# EAGLE board MCU board ATmega328p v2.2 (EAGLE 9.2.1)

Size 19.03 x 26.34 mm. Coordinates in mm from the lower left corner, seen from the top.
Outline: 0,0 19.03,0 19.03,26.34 0,26.34 0,0
Copper layers (1*16): Top 0.035mm / dielectric 1.5mm / Bottom 0.035mm
Design rules "default": minimum track width 6mil, minimum drill 0.35mm, track to track 6mil, track to pad 6mil, pad to pad 6mil, via to via 6mil, smd to smd 6mil, copper to edge 40mil, drill to drill 6mil, minimum pad ring 10mil, minimum via ring 8mil, stop-mask expansion 4mil, vias tented up to drill 0mil, thermal gap 10mil

## Footprints (pad centres in the part's own frame; a part is rotated, then mirrored left to right if it is on the bottom)
CAPPM3216X180N = smd 1.7 x 1.25: 1 -1.35,0; 2 1.35,0
CAPC3216X229N = smd 1.02 x 1.82: 1 -1.4,0; 2 1.4,0
SON75P200X200X100-6N = smd 0.95 x 0.4: 1 -0.9,0.75; 2 -0.9,0; 3 -0.9,-0.75; 4 0.9,-0.75; 5 0.9,0; 6 0.9,0.75
QFN45P400X400X100-29N = smd 0.7 x 0.25: 1 -2.05,1.35; 2 -2.05,0.9; 3 -2.05,0.45; 4 -2.05,0; 5 -2.05,-0.45; 6 -2.05,-0.9; 7 -2.05,-1.35; 15 2.05,-1.35; 16 2.05,-0.9; 17 2.05,-0.45; 18 2.05,0; 19 2.05,0.45; 20 2.05,0.9; 21 2.05,1.35 | smd 0.25 x 0.7: 8 -1.35,-2.05; 9 -0.9,-2.05; 10 -0.45,-2.05; 11 0,-2.05; 12 0.45,-2.05; 13 0.9,-2.05; 14 1.35,-2.05; 22 1.35,2.05; 23 0.9,2.05; 24 0.45,2.05; 25 0,2.05; 26 -0.45,2.05; 27 -0.9,2.05; 28 -1.35,2.05 | smd 2.45 x 2.45: 29 0,0
SOT230P700X170-4N = smd 1.75 x 0.95: 1 -3.15,2.3; 2 -3.15,0; 3 -3.15,-2.3 | smd 1.75 x 3.25: 4 3.15,0
QFN65P600X600X100-29N = smd 1.05 x 0.35: 1 -2.85,1.95; 2 -2.85,1.3; 3 -2.85,0.65; 4 -2.85,0; 5 -2.85,-0.65; 6 -2.85,-1.3; 7 -2.85,-1.95; 15 2.85,-1.95; 16 2.85,-1.3; 17 2.85,-0.65; 18 2.85,0; 19 2.85,0.65; 20 2.85,1.3; 21 2.85,1.95 | smd 0.35 x 1.05: 8 -1.95,-2.85; 9 -1.3,-2.85; 10 -0.65,-2.85; 11 0,-2.85; 12 0.65,-2.85; 13 1.3,-2.85; 14 1.95,-2.85; 22 1.95,2.85; 23 1.3,2.85; 24 0.65,2.85; 25 0,2.85; 26 -0.65,2.85; 27 -1.3,2.85; 28 -1.95,2.85 | smd 4.2 x 4.2: 29 0,0
2X3-NS = drill 1.016 pad 1.88: 1 -2.54,-1.27; 2 -2.54,1.27; 3 0,-1.27; 4 0,1.27; 5 2.54,-1.27; 6 2.54,1.27
2,15/1,0 = drill 1.016 pad 2.159 octagon: 1 0,0
RESC0603X28N = smd 0.625 x 0.4: 1 -0.412,0; 2 0.412,0
SMD1,27-2,54 = smd 1.27 x 2.54: 1 0,0

## Placement (x,y rotation side)
C1  10uF  [CAPPM3216X180N]  13.97,19.05 0 top
C2  22pF  [CAPC3216X229N]  13.97,21.59 180 top
C3  22pF  [CAPC3216X229N]  13.97,24.13 0 top
C4  10uF  [CAPPM3216X180N]  -6.35,-8.89 0 top  (outside the outline)
DOTSTAR  COM-14608  [SON75P200X200X100-6N]  8.89,8.26 180 top
IC1  ATMEGA328P-MMH  [QFN45P400X400X100-29N]  13.97,11.43 0 top
IC2  MIC5239-5.0YS_TR  [SOT230P700X170-4N]  6.35,21.59 0 top
IC3  MCP25625-E_ML  [QFN65P600X600X100-29N]  5.71,13.97 0 top
J1  AVR_SPI_PROG_3X2NS  [2X3-NS]  4.45,5.71 90 top
P_CANH  [2,15/1,0]  0,7.62 0 top
P_CANL  [2,15/1,0]  0,4.45 0 top
P_GND  [2,15/1,0]  0,1.27 0 top
P_I/O1  [2,15/1,0]  0,13.97 0 top
P_I/O2  [2,15/1,0]  0,17.14 0 top
P_I/O3  [2,15/1,0]  0,20.32 0 top
P_I/O4  [2,15/1,0]  0,23.5 0 top
P_I/O5  [2,15/1,0]  19.05,23.5 0 top
P_I/O6  [2,15/1,0]  19.05,20.32 0 top
P_I/O7  [2,15/1,0]  19.05,17.14 0 top
P_I/O8  [2,15/1,0]  19.05,13.97 0 top
P_I/O9  [2,15/1,0]  19.05,10.79 0 top
P_I/O10  [2,15/1,0]  19.05,7.62 0 top
P_I/O11  [2,15/1,0]  19.05,4.45 0 top
P_I/O12  [2,15/1,0]  19.05,1.27 0 top
P_VCC  [2,15/1,0]  0,10.79 0 top
R1  10KΩ  [RESC0603X28N]  8.26,5.08 270 top
RES_PAD1  [SMD1,27-2,54]  9.53,3.17 270 top
RES_PAD2  [SMD1,27-2,54]  9.53,1.27 270 top

## Library data of the parts
C1 C4 = T491A106K016AT; ARROW_PART_NUMBER: T491A106K016AT; ARROW_PRICE-STOCK: https://www.arrow.com/en/products/t491a106k016at/kemet-corporation; DESCRIPTION: Capacitor Tantalum T491 Case A 16V 10uF Kemet ????10% 10????F 16 V dc SMD Tantalum Electrolytic Capacitor, A ESR 7???? +125????C T491; HEIGHT: 1.8mm; MANUFACTURER_NAME: Kemet; MANUFACTURER_PART_NUMBER: T491A106K016AT; RS_PART_NUMBER: 1696687; RS_PRICE-STOCK: http://uk.rs-online.com/web/p/products/1696687
C2 C3 = 12066D106KAT2A; ALLIED_NUMBER: 70002294; ALLIED_PRICE-STOCK: http://www.alliedelec.com/avx-12066d106kat2a/70002294/; ARROW_PART_NUMBER: 12066D106KAT2A; ARROW_PRICE-STOCK: http://uk.rs-online.com/web/p/products/1356756; DESCRIPTION: AVX 10uF /-10% 6.3 V dc X5R Dielectric SMD Ceramic Multilayer Capacitor 1206; HEIGHT: 2.29mm; MANUFACTURER_NAME: AVX; MANUFACTURER_PART_NUMBER: 12066D106KAT2A; RS_PART_NUMBER: 1356756; RS_PRICE-STOCK: http://uk.rs-online.com/web/p/products/1356756
DOTSTAR = APA102–2020; ARROW_PART_NUMBER: COM-14608; DESCRIPTION: SparkFun Accessories SMD LED - RGB APA102-2020; HEIGHT: 1mm; MANUFACTURER_NAME: SparkFun; MANUFACTURER_PART_NUMBER: COM-14608
IC1 = ATMEGA328P-MMH; ARROW_PART_NUMBER: ATMEGA328P-MMH; ARROW_PRICE-STOCK: https://www.arrow.com/en/products/atmega328p-mmh/microchip-technology; DESCRIPTION: Atmel ATMEGA328P-MMH, 8bit AVR Microcontroller, 20MHz, 32 kB Flash, 28-Pin QFN; HEIGHT: 1mm; MANUFACTURER_NAME: Microchip; MANUFACTURER_PART_NUMBER: ATMEGA328P-MMH; RS_PART_NUMBER: 1310272P; RS_PRICE-STOCK: http://uk.rs-online.com/web/p/products/1310272P
IC2 = MIC5239-5.0YS_TR; ARROW_PART_NUMBER: MIC5239-5.0YS TR; ARROW_PRICE-STOCK: http://uk.rs-online.com/web/p/products/7275535P; DESCRIPTION: LDO Regulator Pos 5V 0.5A Micrel MIC5239-5.0YS TR, LDO Voltage Regulator, 500mA, 5 V 1%, 2.3 30 Vin, 3 + Tab-Pin SOT-223; HEIGHT: 1.7mm; MANUFACTURER_NAME: Micrel; MANUFACTURER_PART_NUMBER: MIC5239-5.0YS TR; RS_PART_NUMBER: 7275535P; RS_PRICE-STOCK: http://uk.rs-online.com/web/p/products/7275535P
IC3 = MCP25625-E_ML; ALLIED_NUMBER: 70431541; ALLIED_PRICE-STOCK: http://www.alliedelec.com/microchip-technology-inc-mcp25625-e-ml/70431541/; ARROW_PART_NUMBER: MCP25625-E/ML; ARROW_PRICE-STOCK: https://www.arrow.com/en/products/mcp25625-eml/microchip-technology; DESCRIPTION: CAN Controller with Transceiver QFN28 Microchip MCP25625-E/ML, CAN Controller, 28-Pin QFN; HEIGHT: 1mm; MANUFACTURER_NAME: Microchip; MANUFACTURER_PART_NUMBER: MCP25625-E/ML; RS_PART_NUMBER: 1654104; RS_PRICE-STOCK: http://uk.rs-online.com/web/p/products/1654104
J1 = SparkFun-Connectors
P_CANH P_CANL P_GND P_I/O1-P_I/O12 P_VCC RES_PAD1 RES_PAD2 = wirepad
R1 = CPF0201D10KC1; ARROW_PART_NUMBER: CPF0201D10KC1; ARROW_PRICE-STOCK: http://uk.rs-online.com/web/p/products/7549833; DESCRIPTION: TE Connectivity CPF Series Thin Film Surface Mount Fixed Resistor 0201 Case 10k 0.5% 0.031W 50ppm/C; HEIGHT: 0.28mm; MANUFACTURER_NAME: TE Connectivity; MANUFACTURER_PART_NUMBER: CPF0201D10KC1; RS_PART_NUMBER: 7549833; RS_PRICE-STOCK: http://uk.rs-online.com/web/p/products/7549833

## Nets
5V: C1.1 DOTSTAR.4 IC1.3 IC2.3 IC3.3 IC3.19 J1.2 R1.2
CAN_CS: IC1.10 IC3.1
CANH: IC3.13 P_CANH.1
CANL: IC3.12 P_CANL.1
GND: C1.2 C4.1 DOTSTAR.3 IC2.2 IC3.22 J1.6 P_GND.1 RES_PAD2.1
I/O1: P_I/O1.1
I/O2: P_I/O2.1
I/O3: P_I/O3.1
I/O4: P_I/O4.1
I/O5: P_I/O5.1
I/O6: P_I/O9.1
I/O7: P_I/O8.1
I/O8: P_I/O7.1
I/O9: P_I/O6.1
I/O10: P_I/O10.1
I/O11: P_I/O11.1
I/O12: P_I/O12.1
MISO: IC1.14 J1.1
MISO_MCP: IC3.28
MOSI: IC1.13 J1.4
MOSI_MCP: IC3.27
N$12: IC3.25
OSC1: C2.2 IC1.5 IC3.21
OSC2: C3.2 IC1.6 IC3.20
RESET_MCU: IC1.25 J1.5 R1.1 RES_PAD1.1
RXCAN: IC3.5 IC3.10
SCK: IC1.15 J1.3
SCK_MCP: IC3.26
SS: IC1.12
TXCAN: IC3.4 IC3.16
VCC: C4.2 IC2.1 P_VCC.1
VSS: IC3.18

## Tracks (layer width: path | path; a pad name or v marks a point on that pad's centre or on a via)
5V  (7 unrouted)
CAN_CS  (1 unrouted)
CANH  (1 unrouted)
CANL  (1 unrouted)
GND  (7 unrouted)
MISO  (1 unrouted)
MOSI  (1 unrouted)
OSC1  (2 unrouted)
OSC2  (2 unrouted)
RESET_MCU  (3 unrouted)
RXCAN  (1 unrouted)
SCK  (1 unrouted)
TXCAN  (1 unrouted)
VCC  (2 unrouted)